# Altium PCB 6APoLPSU.PcbDoc
Units mil, origin at the board's own origin, x right, y up, seen from the top; angles counter-clockwise.
Board outline 1580 x 955 mil, 2 copper layers (Top Layer, Bottom Layer); 27 components, 16 nets, 83 pads, 58 vias.
Unrouted connection lines stored in the file: 1.
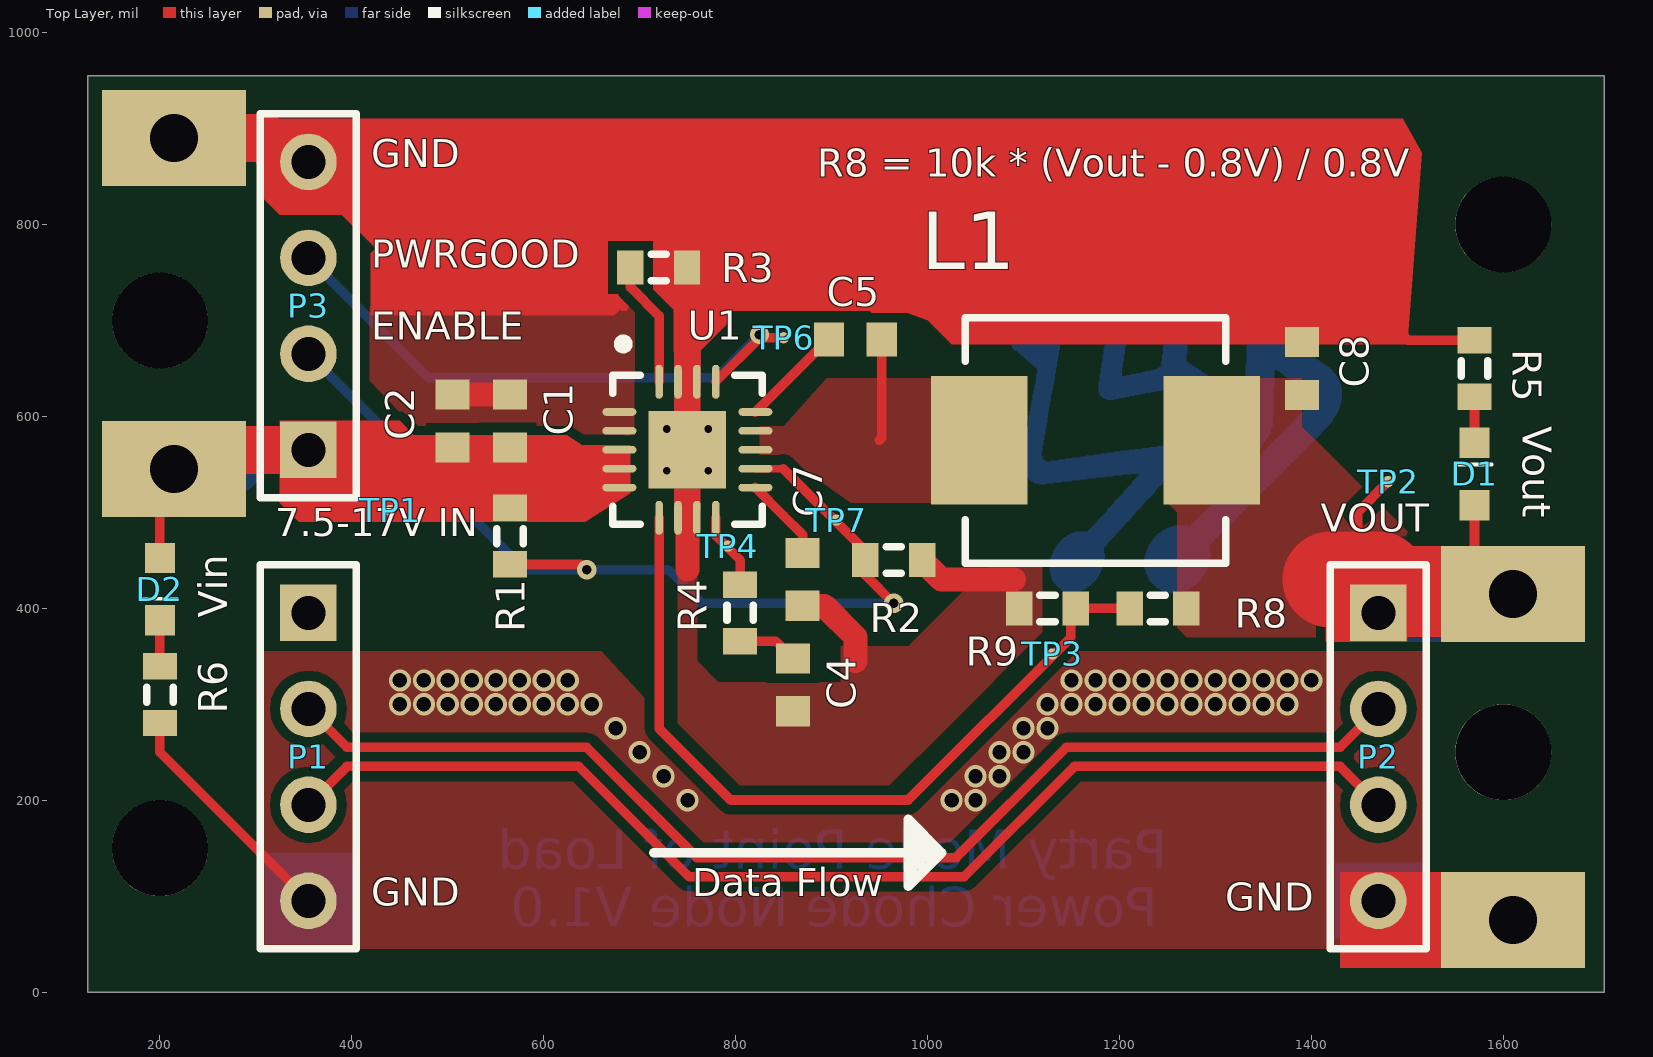
[diagram p0: Top Layer view]
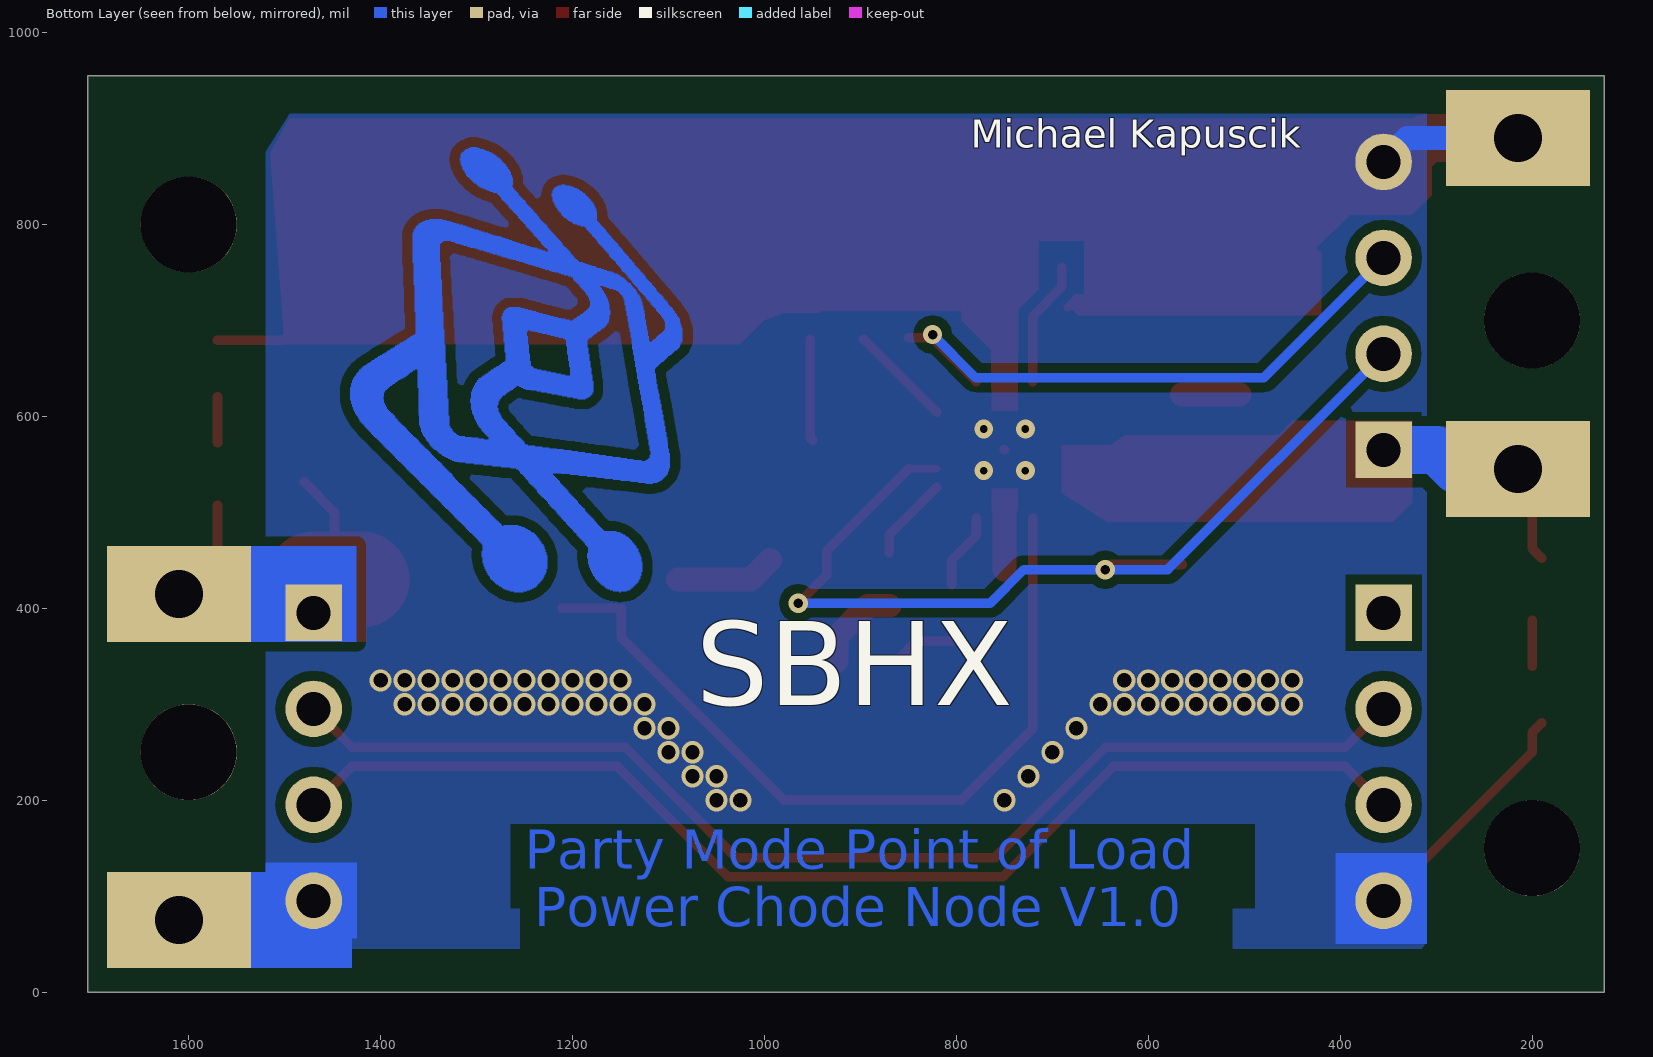
[diagram p1: Bottom Layer view, seen from below]

## Layer stack, top to bottom
Top Solder: solder mask 0.4, Solder Resist, Dk 3.5
Top Layer: signal copper 1.4
Dielectric 1: dielectric 12.6, FR-4, Dk 4.8
Bottom Layer: signal copper 1.4
Bottom Solder: solder mask 0.4, Solder Resist, Dk 3.5

## Board outline
125,0 125,955 1705,955 1705,0

## Design rules (kind name [scope] priority, off if disabled: settings)
Clearance [All] p1: gap=10 ignorepadtopadclearanceinfootprint=FALSE except(0: Arc-Hole Track-Hole SMDPad-Hole THPad-Hole Via-Hole Fill-Hole Poly-Hole Region-Hole Text-Hole)
PolygonConnect [InComponent('U1')] p1: connectstyle=Direct reliefconductorwidth=10 reliefentries=4 polygonreliefangle="90 Angle" airgapwidth=10
PolygonConnect PolygonConnect_1 [All] p2: connectstyle=Direct reliefconductorwidth=10 reliefentries=4 polygonreliefangle="90 Angle" airgapwidth=10
RoutingVias [All] p1: holewidth=28 width=50 viastyle="Through Hole" minholewidth=28 minwidth=50 maxholewidth=28 maxwidth=50
SolderMaskExpansion [All] p1: expansion=4 istentingtop=FALSE
Width [All] p1: maxlimit=100 minlimit=10 preferedwidth=10 minimp=50.000000 maximp=50.000000 favimp=50.000000
30 further rules are at their usual default settings.

## Classes and differential pairs
component class U_TPS54620: C1 C2 C4 C5 C7 C8 D1 D2 L1 R1 R2 R3 R4 R5 R6 R8 R9 TP1 TP2 TP3 TP4 TP6 TP7 U1
component class Top: P1 P2 P3

## Components (designator, comment, footprint, x,y, rotation, side; value= is the part's Value field where it differs from the comment)
C1 "Cap" 1608[0603] 564.76,595.24 r90 top
C2 "Cap" 1608[0603] 504.76,595.24 r90 top
C4 "Cap" 1608[0603] 859.76,320.24 r90 top
C5 "Cap" 1608[0603] 924.76,680.24 r0 top
C7 "Cap" 1608[0603] 869.76,430.24 r90 top
C8 "Cap" 1608[0603] 1390,650 r270 top
D1 "LED0" "0603 LED" 1570,540 r90 top
D2 "LED0" "0603 LED" 200,420 r270 top
L1 "IHLP2525CZER3R3M01" INDP6965X30M 1175,575 r0 top
P1 "WS2801 Connector" HDR1X4 354.76,395.24 r270 top
P2 "WS2801 Connector" HDR1X4 1469.76,395.24 r270 top
P3 "Header 4" HDR1X4 354.76,565.24 r90 top
R1 "Res3" J1-0603 564.76,475.24 r90 top
R2 "Res3" J1-0603 964.76,450.24 r180 top
R3 "Res3" J1-0603 719.76,755.24 r0 top
R4 "Res3" J1-0603 804.76,395.24 r90 top
R5 "Res3" J1-0603 1570,650 r270 top
R6 "Res3" J1-0603 200,310 r90 top
R8 "Res3" J1-0603 1240,400 r0 top
R9 "Res3" J1-0603 1125,400 r0 top
TP1 "Test Point" TESTPOINT_0.3mm 440,500 r90 top
TP2 "Test Point" TESTPOINT_0.3mm 1480,530 r90 top
TP3 "Test Point" TESTPOINT_0.3mm 1130,350.47 r90 top
TP4 "Test Point" TESTPOINT_0.3mm 792.03,462.97 r90 top
TP6 "Test Point" TESTPOINT_0.3mm 850,680 r90 top
TP7 "Test Point" TESTPOINT_0.3mm 905,490 r90 top
U1 "Buck Regulator" S-PVQFN-N14 749.76,565.24 r270 top

## Footprints (in the part's own frame and the unit in brackets; to place one, negate y for a bottom-side part, rotate by r counter-clockwise, add the part's x,y. Pads: shape width x height; smd on the part's side, far side on the other; paste and mask are expansions set on the pad)
"0603 LED" [mm]
  rect 0.8x0.8 smd: 1(-0.825,0) 2(0.825,0)
  silkscreen extent 0.25,-0.46 0.25,0.46
1608[0603] [mm] "Chip Capacitor, Body 1.6x0.8mm, IPC High Density"
  rect 0.8x0.9 smd: 1(-0.7,0) 2(0.7,0)
  body extent -0.87,-0.48 0.87,0.48, height 1.3
HDR1X4 [mm] "Connector; Header; 4 Position"
  rect 1.5x1.5 hole 0.9: 1(0,0)
  round 1.5 hole 0.9: 2(2.54,0) 3(5.08,0) 4(7.62,0)
  silkscreen extent -1.27,-1.27 8.89,1.27
INDP6965X30M [mm] "Precision Wire Wound Inductor, 2-Leads, Body 6.86x6.47mm, IPC Low Density"
  rect 2.55x3.4 smd: 1(-3.075,0) 2(3.075,0)
  silkscreen extent -3.45,-3.25 3.45,3.25, body extent -3.43,-3.23 3.43,3.23, height 3
J1-0603 [mm] "Chip Resistor, Body 1.6x0.8mm, IPC High Density"
  rect 0.7x0.9 smd: 1(-0.75,0) 2(0.75,0)
  silkscreen extent -0.2,-0.35 0.2,0.35, body extent -0.85,-0.48 0.85,0.48, height 0.9
S-PVQFN-N14 [mm] "TI-TPS54620 Boost Converter"
  oval 0.9x0.2 smd: 1(-1.8,-0.75) 7(1.8,-0.75) 8(1.8,0.75) 14(-1.8,0.75) PAD(-1.8,-0.25) PAD(-1.8,0.25) PAD(1.8,-0.25) PAD(1.8,0.25)
  oval 0.2x0.9 smd: 2(-1,-1.8) 3(-0.5,-1.8) 4(0,-1.8) 5(0.5,-1.8) 6(1,-1.8) 9(1,1.8) 10(0.5,1.8) 11(0,1.8) 12(-0.5,1.8) 13(-1,1.8)
  rect 2.05x2.05 smd: PAD(0,0)
  Top Layer region: -1.625,-0.35 -1.025,-0.35 -1.025,0.35 -1.625,0.35
  Top Layer region: 1.625,0.35 1.025,0.35 1.025,-0.35 1.625,-0.35
  silkscreen extent -2.92,-1.97 1.97,1.97, body extent -1.83,-1.83 1.83,1.83, height 1
TESTPOINT_0.3mm [mm]
  round 0.3 smd paste-1: TP(0.05,0)

## Part data
C1 C2 C4 C5 C7 C8: library part "Cap Semi", "Capacitor (Semiconductor SIM Model)"
D1 D2: "Typical INFRARED GaAs LED"
L1: "3.3uH Shielded Inductor"
P1 P2 P3: "Header, 4-Pin"
R1 R2 R3 R4 R5 R6 R8 R9: "Resistor"
U1: library part TPS54620RGYT, "IC REG BUCK ADJ 6A SYNC 14VQFN"

## Free pads (board coordinates)
  round 100 hole 100: 0(200,150) 0(200,700) 1(1600,250) 1(1600,800)
  rect 150x100 hole 50 unplated: 0(214.76,545.24) 1(214.76,890.24) 1(1610,75) 1(1610,415)
  rect 150x100 smd far side: 0(214.76,545.24) 1(214.76,890.24) 1(1610,75) 1(1610,415)

## Via types
v1: diameter 23, hole 15, Top Layer to Bottom Layer, 51 vias
v2: diameter 19.68, hole 7.87, Top Layer to Bottom Layer, 4 vias
v3: diameter 20, hole 10, Top Layer to Bottom Layer, 3 vias

## Nets (pads, with @x,y where several pads share a name; then routed paths per layer and width w, separated by ;. In a path a pad name is that pad's centre, name@x,y a point inside that pad or via, vN(x,y) a via of type N, cw(c..) or ccw(c..) an arc to the next point about the centre after c; other vN are vias at no path point)
EN: P3.2 R1.1 R2.2 TP7.TP U1.10 | length 1016.9
  Top Layer w8: U1.10 849.45,545.55
  Top Layer w10: R1.1 639.29,445.71 v3(644.76,440.24) ; 849.45,545.55 935.24,459.76 R2.2 935.24,434.76 v3(964.76,405.24)
  Bottom Layer w10: P3.2 579.76,440.24 v3(644.76,440.24) 729.76,440.24 764.76,405.24 v3(964.76,405.24)
GND: C1.2 C2.2 C4.1 C7.1 C8.1 P1.4 P2.4 P3.4 pad.1@214.76,890.24 pad.1@1610,75 R2.1 R3.2 R5.1 R6.1 R9.1 U1.2 U1.3 U1.PAD | length 966.9
  Top Layer w10: R6.1@190,280.47 200,270.47 200,250 P1.4 ; U1.PAD@749.76,565.24 U1.PAD@750,565.47 ; 1490,690 1500.47,679.53 R5.1
  Top Layer w25: 329.76,890.24 P3.4 ; C2.2 C1.2 ; 749.76,440.24 749.76,500.24 ; C7.1 892.32,402.68 924.76,370.24 924.76,345.24 ; R2.1 1014.29,430.24 1090.24,430.24
  Top Layer w50: pad.1@214.76,890.24 309.76,890.24 334.76,865.24 P3.4
  Bottom Layer w25: pad.1@239.76,890.24 329.76,890.24 P3.4
  other v1: 750,200 1025,200 1050,200 725,225 1050,225 1075,225 700,250 1075,250 1100,250 675,275 1100,275 1125,275 450,300 475,300 500,300 525,300 550,300 575,300 600,300 625,300 650,300 1125,300 1150,300 1175,300 1200,300 1225,300 1250,300 1275,300 1300,300 1325,300 1350,300 1375,300 450,325 475,325 500,325 525,325 550,325 575,325 600,325 625,325 1150,325 1175,325 1200,325 1225,325 1250,325 1275,325 1300,325 1325,325 1350,325 1375,325 1400,325
  other v2: 728.11,543.58 771.42,543.58 728.11,586.89 771.42,586.89
NetC4_2: C4.2 R4.1 | length 62.4
  Top Layer w10: R4.1 841.85,365.71 C4.2
NetC5_1: C5.1 U1.13 | length 107.9
  Top Layer w10: U1.13 896.26,680.24 C5.1
NetC5_2: C5.2 L1.1 U1.11 U1.12 | length 106
  Top Layer w10: 949.96,575.24 952.32,577.6 C5.2
NetC7_2: C7.2 U1.9 | length 88.4
  Top Layer w10: U1.9 850,496.5 869.76,476.73 C7.2
NetD1_2: D1.2 R5.2 | length 48
  Top Layer w10: D1.2 R5.2
NetD2_2: D2.2 R6.2 | length 48
  Top Layer w10: R6.2 D2.2
NetP1_2: P1.2 P2.2 | length 1243.4
  Top Layer w10: P1.2 394.76,255.24 644.76,255.24 759.76,140.24 1029.76,140.24 1144.76,255.24 1429.76,255.24 P2.2
NetP1_3: P1.3 P2.3 | length 1243.4
  Top Layer w10: P1.3 394.76,235.24 636.48,235.24 751.48,120.24 1038.05,120.24 1153.05,235.24 1429.76,235.24 P2.3
NetP3_3: P3.3 TP6.TP U1.14 | length 630.1
  Top Layer w10: U1.14 825.16,681.97 TP6.TP
  Bottom Layer w10: P3.3 479.76,640.24 779.76,640.24 v3(824.76,685.24)
NetR3_1: R3.1 U1.1 | length 131.6
  Top Layer w10: R3.1 690.24,734.76 720.24,704.76 U1.1
NetR4_2: R4.2 TP4.TP U1.8 | length 80.2
  Top Layer w10: U1.8 779.29,475.71 804.76,450.24 R4.2
NetR8_1: R8.1 R9.2 TP3.TP U1.7 | length 835.9
  Top Layer w10: U1.7 720.24,274.76 794.76,200.24 979.76,200.24 1149.29,369.76 R9.2@1149.29,400 ; R9.2 R8.1
VIN: C1.1 C2.1 D2.1 P3.1 pad.0@214.76,545.24 R1.2 TP1.TP U1.4 U1.5 U1.6 | length 359.9
  Top Layer w10: D2.1@190,452.48 200,462.48 200,505.47 pad.0@239.76,545.24
  Top Layer w50: pad.0@239.76,545.24 259.76,565.24 P3.1
  Bottom Layer w50: pad.0@239.76,545.24 279.76,545.24 299.76,565.24 P3.1
VOUT: C8.2 D1.1 L1.2 P2.1 pad.1@1610,415 R8.2 TP2.TP | length 285.9
  Top Layer w10: 1420,430 1448.03,458.03 1448.03,500 TP2.TP ; D1.1 1570,455 pad.1@1610,415
  Top Layer w100: 1420,430 1470,430
pads on no net: P1.1
copper on no net: | length 53410
  Bottom Layer w1: 1085.5,678 1117.5,678 ; 1085.5,679 1116.5,679 ; 1085.5,680 1115.5,680 ; 1085.5,681 1113.5,681 ; 1085.5,682 1112.5,682 ; 1085.5,683 1111.5,683 ; 1085.5,684 1110.5,684 ; 1085.5,685 1109.5,685 ; 1085.5,686 1107.5,686 ; 1085.5,687 1106.5,687 ; 1085.5,688 1105.5,688 ; 1085.5,689 1104.5,689 ; 1085.5,690 1104.5,690 ; 1085.5,691 1103.5,691 ; 1085.5,692 1103.5,692 ; 1086.5,676 1138.5,676 ; 1086.5,677 1138.5,677 ; 1086.5,693 1103.5,693 ; 1086.5,694 1103.5,694 ; 1086.5,695 1103.5,695 ; 1087.5,674 1137.5,674 ; 1087.5,675 1137.5,675 ; 1087.5,696 1103.5,696 ; 1087.5,697 1103.5,697 ; 1087.5,698 1103.5,698 ; 1088.5,672 1137.5,672 ; 1088.5,673 1137.5,673 ; 1088.5,699 1104.5,699 ; 1088.5,700 1104.5,700 ; 1088.5,701 1105.5,701 ; 1089.5,671 1137.5,671 ; 1089.5,702 1105.5,702 ; 1089.5,703 1106.5,703 ; 1090.5,670 1137.5,670 ; 1090.5,704 1107.5,704 ; 1091.5,669 1136.5,669 ; 1091.5,705 1107.5,705 ; 1091.5,706 1108.5,706 ; 1092.5,707 1109.5,707 ; 1093.5,668 1136.5,668 ; 1093.5,708 1110.5,708 ; 1093.5,709 1111.5,709 ; 1094.5,667 1136.5,667 ; 1094.5,710 1112.5,710 ; 1095.5,666 1136.5,666 ; 1095.5,711 1112.5,711 ; 1095.5,712 1113.5,712 ; 1096.5,665 1136.5,665 ; 1096.5,713 1114.5,713 ; 1097.5,664 1136.5,664 ; 1097.5,714 1115.5,714 ; 1098.5,546 1264.5,546 ; 1098.5,547 1274.5,547 ; 1098.5,548 1283.5,548 ; 1098.5,549 1292.5,549 ; 1098.5,550 1302.5,550 ; 1098.5,551 1311.5,551 ; 1098.5,552 1318.5,552 ; 1098.5,553 1322.5,553 ; 1098.5,554 1123.5,554 ; 1098.5,555 1121.5,555 ; 1098.5,556 1120.5,556 ; 1098.5,557 1119.5,557 ; 1098.5,558 1119.5,558 ; 1098.5,559 1119.5,559 ; 1098.5,560 1118.5,560 ; 1098.5,561 1118.5,561 ; 1098.5,663 1135.5,663 ; 1098.5,715 1116.5,715 ; 1099.5,543 1255.5,543 ; 1099.5,544 1256.5,544 ; 1099.5,545 1258.5,545 ; 1099.5,562 1118.5,562 ; 1099.5,563 1118.5,563 ; 1099.5,564 1119.5,564 ; 1099.5,565 1119.5,565 ; 1099.5,566 1119.5,566 ; 1099.5,716 1117.5,716 ; 1100.5,541 1254.5,541 ; 1100.5,542 1254.5,542 ; 1100.5,567 1119.5,567 ; 1100.5,568 1119.5,568 ; 1100.5,569 1119.5,569 ; 1100.5,570 1120.5,570 ; 1100.5,571 1120.5,571 ; 1100.5,572 1120.5,572 ; 1100.5,662 1135.5,662 ; 1100.5,717 1118.5,717 ; 1100.5,718 1118.5,718 ; 1101.5,539 1202.5,539 ; 1101.5,540 1211.5,540 ; 1101.5,573 1120.5,573 ; 1101.5,574 1120.5,574 ; 1101.5,575 1120.5,575 ; 1101.5,576 1121.5,576 ; 1101.5,577 1121.5,577 ; 1101.5,578 1121.5,578 ; 1101.5,661 1135.5,661 ; 1101.5,719 1119.5,719 ; 1102.5,538 1193.5,538 ; 1102.5,579 1121.5,579 ; 1102.5,580 1121.5,580 ; 1102.5,581 1121.5,581 ; 1102.5,582 1122.5,582 ; 1102.5,583 1122.5,583 ; 1102.5,660 1135.5,660 ; 1102.5,720 1120.5,720 ; 1103.5,537 1184.5,537 ; 1103.5,584 1122.5,584 ; 1103.5,585 1122.5,585 ; 1103.5,586 1122.5,586 ; 1103.5,587 1122.5,587 ; 1103.5,588 1123.5,588 ; 1103.5,589 1123.5,589 ; 1103.5,659 1135.5,659 ; 1103.5,721 1121.5,721 ; 1104.5,536 1174.5,536 ; 1104.5,590 1123.5,590 ; 1104.5,591 1123.5,591 ; 1104.5,592 1123.5,592 ; 1104.5,593 1123.5,593 ; 1104.5,594 1124.5,594 ; 1104.5,595 1124.5,595 ; 1104.5,658 1135.5,658 ; 1104.5,722 1122.5,722 ; 1105.5,535 1166.5,535 ; 1105.5,596 1124.5,596 ; 1105.5,597 1124.5,597 ; 1105.5,598 1124.5,598 ; 1105.5,599 1124.5,599 ; 1105.5,600 1125.5,600 ; 1105.5,601 1125.5,601 ; 1105.5,657 1134.5,657 ; 1105.5,723 1123.5,723 ; 1105.5,724 1123.5,724 ; 1106.5,534 1157.5,534 ; 1106.5,602 1125.5,602 ; 1106.5,603 1125.5,603 ; 1106.5,604 1125.5,604 ; 1106.5,605 1125.5,605 ; 1106.5,606 1126.5,606 ; 1106.5,725 1124.5,725 ; 1107.5,533 1149.5,533 ; 1107.5,607 1126.5,607 ; 1107.5,608 1126.5,608 ; 1107.5,609 1126.5,609 ; 1107.5,610 1126.5,610 ; 1107.5,611 1126.5,611 ; 1107.5,612 1127.5,612 ; 1107.5,656 1134.5,656 ; 1107.5,726 1125.5,726 ; 1108.5,613 1127.5,613 ; 1108.5,614 1127.5,614 ; 1108.5,615 1127.5,615 ; 1108.5,616 1127.5,616 ; 1108.5,617 1128.5,617 ; 1108.5,655 1134.5,655 ; 1108.5,727 1126.5,727 ; 1109.5,532 1139.5,532 ; 1109.5,618 1128.5,618 ; 1109.5,619 1128.5,619 ; 1109.5,620 1128.5,620 ; 1109.5,621 1128.5,621 ; 1109.5,622 1128.5,622 ; 1109.5,623 1129.5,623 ; 1109.5,654 1134.5,654 ; 1109.5,728 1127.5,728 ; 1110.5,624 1129.5,624 ; 1110.5,625 1129.5,625 ; 1110.5,626 1129.5,626 ; 1110.5,627 1129.5,627 ; 1110.5,653 1134.5,653 ; 1110.5,729 1128.5,729 ; 1111.5,531 1131.5,531 ; 1111.5,628 1130.5,628 ; 1111.5,629 1130.5,629 ; 1111.5,630 1130.5,630 ; 1111.5,631 1130.5,631 ; 1111.5,632 1130.5,632 ; 1111.5,633 1130.5,633 ; 1111.5,652 1134.5,652 ; 1111.5,730 1129.5,730 ; 1112.5,634 1131.5,634 ; 1112.5,635 1131.5,635 ; 1112.5,636 1131.5,636 ; 1112.5,637 1131.5,637 ; 1112.5,638 1131.5,638 ; 1112.5,651 1133.5,651 ; 1112.5,731 1130.5,731 ; 1112.5,732 1131.5,732 ; 1113.5,639 1132.5,639 ; 1113.5,640 1132.5,640 ; 1113.5,641 1132.5,641 ; 1113.5,642 1132.5,642 ; 1113.5,643 1132.5,643 ; 1113.5,644 1132.5,644 ; 1113.5,650 1133.5,650 ; 1113.5,733 1131.5,733 ; 1114.5,645 1132.5,645 ; 1114.5,646 1133.5,646 ; 1114.5,647 1133.5,647 ; 1114.5,648 1133.5,648 ; 1114.5,649 1133.5,649 ; 1114.5,734 1132.5,734 ; 1115.5,735 1133.5,735 ; 1116.5,530 1123.5,530 ; 1116.5,736 1134.5,736 ; 1117.5,737 1135.5,737 ; 1117.5,738 1136.5,738 ; 1118.5,739 1136.5,739 ; 1119.5,678 1138.5,678 ; 1119.5,740 1137.5,740 ; 1120.5,679 1138.5,679 ; 1120.5,680 1138.5,680 ; 1120.5,681 1138.5,681 ; 1120.5,682 1139.5,682 ; 1120.5,683 1139.5,683 ; 1120.5,741 1138.5,741 ; 1121.5,684 1139.5,684 ; 1121.5,685 1139.5,685 ; 1121.5,686 1139.5,686 ; 1121.5,687 1139.5,687 ; 1121.5,688 1140.5,688 ; 1121.5,689 1140.5,689 ; 1121.5,742 1139.5,742 ; 1122.5,690 1140.5,690 ; 1122.5,691 1140.5,691 ; 1122.5,692 1140.5,692 ; 1122.5,693 1141.5,693 ; 1122.5,694 1141.5,694 ; 1122.5,743 1140.5,743 ; 1123.5,695 1141.5,695 ; 1123.5,696 1141.5,696 ; 1123.5,697 1141.5,697 ; 1123.5,698 1141.5,698 ; 1123.5,699 1142.5,699 ; 1123.5,700 1142.5,700 ; 1123.5,744 1141.5,744 ; 1123.5,745 1142.5,745 ; 1124.5,701 1142.5,701 ; 1124.5,702 1142.5,702 ; 1124.5,703 1142.5,703 ; 1124.5,704 1142.5,704 ; 1124.5,705 1143.5,705 ; 1124.5,706 1143.5,706 ; 1124.5,746 1142.5,746 ; 1125.5,707 1143.5,707 ; 1125.5,708 1143.5,708 ; 1125.5,709 1143.5,709 ; 1125.5,710 1144.5,710 ; 1125.5,747 1143.5,747 ; 1126.5,711 1144.5,711 ; 1126.5,712 1144.5,712 ; 1126.5,713 1144.5,713 ; 1126.5,714 1144.5,714 ; 1126.5,715 1144.5,715 ; 1126.5,748 1144.5,748 ; 1127.5,438 1180.5,438 ; 1127.5,439 1180.5,439 ; 1127.5,440 1181.5,440 ; 1127.5,441 1181.5,441 ; 1127.5,442 1181.5,442 ; 1127.5,443 1182.5,443 ; 1127.5,444 1182.5,444 ; 1127.5,445 1182.5,445 ; 1127.5,446 1183.5,446 ; 1127.5,447 1183.5,447 ; 1127.5,448 1183.5,448 ; 1127.5,716 1145.5,716 ; 1127.5,717 1145.5,717 ; 1127.5,718 1145.5,718 ; 1127.5,719 1145.5,719 ; 1127.5,749 1145.5,749 ; 1128.5,434 1178.5,434 ; 1128.5,435 1178.5,435 ; 1128.5,436 1179.5,436 ; 1128.5,437 1179.5,437 ; 1128.5,449 1183.5,449 ; 1128.5,450 1183.5,450 ; 1128.5,451 1183.5,451 ; 1128.5,452 1184.5,452 ; 1128.5,453 1184.5,453 ; 1128.5,554 1325.5,554 ; 1128.5,720 1145.5,720 ; 1128.5,721 1146.5,721 ; 1128.5,722 1146.5,722 ; 1128.5,750 1146.5,750 ; 1129.5,431 1176.5,431 ; 1129.5,432 1176.5,432 ; 1129.5,433 1177.5,433 ; 1129.5,454 1184.5,454 ; 1129.5,455 1184.5,455 ; 1129.5,456 1184.5,456 ; 1129.5,723 1146.5,723 ; 1129.5,724 1147.5,724 ; 1129.5,751 1147.5,751 ; 1129.5,752 1148.5,752 ; 1130.5,429 1174.5,429 ; 1130.5,430 1175.5,430 ; 1130.5,457 1184.5,457 ; 1130.5,458 1183.5,458 ; 1130.5,725 1147.5,725 ; 1130.5,726 1148.5,726 ; 1130.5,753 1148.5,753 ; 1131.5,427 1172.5,427 ; 1131.5,428 1173.5,428 ; 1131.5,459 1183.5,459 ; 1131.5,460 1183.5,460 ; 1131.5,461 1183.5,461 ; 1131.5,727 1149.5,727 ; 1131.5,754 1149.5,754 ; 1132.5,426 1171.5,426 ; 1132.5,462 1183.5,462 ; 1132.5,728 1150.5,728 ; 1132.5,729 1151.5,729 ; 1132.5,755 1150.5,755 ; 1133.5,425 1170.5,425 ; 1133.5,463 1183.5,463 ; 1133.5,464 1184.5,464 ; 1133.5,730 1152.5,730 ; 1133.5,731 1154.5,731 ; 1133.5,756 1151.5,756 ; 1134.5,424 1169.5,424 ; 1134.5,465 1185.5,465 ; 1134.5,732 1157.5,732 ; 1134.5,757 1152.5,757 ; 1135.5,423 1167.5,423 ; 1135.5,466 1186.5,466 ; 1135.5,467 1186.5,467 ; 1135.5,733 1161.5,733 ; 1135.5,758 1153.5,758 ; 1135.5,759 1154.5,759 ; 1136.5,422 1166.5,422 ; 1136.5,468 1187.5,468 ; 1136.5,555 1327.5,555 ; 1136.5,734 1164.5,734 ; 1136.5,760 1154.5,760 ; 1137.5,421 1165.5,421 ; 1137.5,469 1188.5,469 ; 1137.5,735 1167.5,735 ; 1137.5,761 1155.5,761 ; 1138.5,470 1189.5,470 ; 1138.5,736 1192.5,736 ; 1138.5,762 1156.5,762 ; 1139.5,420 1163.5,420 ; 1139.5,471 1190.5,471 ; 1139.5,737 1193.5,737 ; 1139.5,738 1194.5,738 ; 1139.5,763 1157.5,763 ; 1140.5,419 1160.5,419 ; 1140.5,472 1191.5,472 ; 1140.5,764 1158.5,764 ; 1141.5,473 1192.5,473 ; 1141.5,739 1195.5,739 ; 1141.5,765 1159.5,765 ; 1141.5,766 1160.5,766 ; 1142.5,474 1193.5,474 ; 1142.5,740 1196.5,740 ; 1142.5,767 1161.5,767 ; 1143.5,418 1157.5,418 ; 1143.5,556 1329.5,556 ; 1143.5,741 1197.5,741 ; 1143.5,768 1161.5,768 ; 1144.5,475 1194.5,475 ; 1144.5,742 1198.5,742 ; 1144.5,769 1162.5,769 ; 1145.5,476 1195.5,476 ; 1145.5,743 1199.5,743 ; 1145.5,770 1163.5,770 ; 1146.5,744 1199.5,744 ; 1146.5,771 1164.5,771 ; 1147.5,477 1195.5,477 ; 1147.5,772 1165.5,772 ; 1147.5,773 1166.5,773 ; 1148.5,745 1201.5,745 ; 1148.5,774 1167.5,774 ; 1149.5,417 1151.5,417 ; 1149.5,478 1196.5,478 ; 1149.5,775 1167.5,775 ; 1150.5,557 1331.5,557 ; 1150.5,746 1204.5,746 ; 1150.5,776 1168.5,776 ; 1151.5,479 1197.5,479 ; 1151.5,747 1208.5,747 ; 1151.5,777 1169.5,777 ; 1152.5,778 1170.5,778 ; 1152.5,779 1171.5,779 ; 1153.5,748 1211.5,748 ; 1153.5,780 1172.5,780 ; 1154.5,480 1198.5,480 ; 1154.5,781 1173.5,781 ; 1155.5,782 1173.5,782 ; 1156.5,749 1214.5,749 ; 1156.5,783 1174.5,783 ; 1157.5,784 1175.5,784 ; 1158.5,558 1333.5,558 ; 1158.5,750 1218.5,750 ; 1158.5,785 1176.5,785 ; 1159.5,786 1177.5,786 ; 1159.5,787 1178.5,787 ; 1160.5,706 1191.5,706 ; 1160.5,707 1189.5,707 ; 1160.5,708 1188.5,708 ; 1160.5,709 1187.5,709 ; 1160.5,710 1185.5,710 ; 1160.5,788 1179.5,788 ; 1161.5,701 1198.5,701 ; 1161.5,702 1196.5,702 ; 1161.5,703 1195.5,703 ; 1161.5,704 1194.5,704 ; 1161.5,705 1192.5,705 ; 1161.5,711 1184.5,711 ; 1161.5,712 1183.5,712 ; 1161.5,713 1182.5,713 ; 1161.5,714 1182.5,714 ; 1161.5,715 1181.5,715 ; 1161.5,716 1181.5,716 ; 1161.5,751 1221.5,751 ; 1161.5,789 1179.5,789 ; 1162.5,698 1272.5,698 ; 1162.5,699 1272.5,699 ; 1162.5,700 1199.5,700 ; 1162.5,717 1181.5,717 ; 1162.5,718 1181.5,718 ; 1162.5,719 1181.5,719 ; 1162.5,790 1180.5,790 ; 1163.5,697 1272.5,697 ; 1163.5,720 1181.5,720 ; 1163.5,721 1182.5,721 ; 1163.5,722 1182.5,722 ; 1163.5,791 1181.5,791 ; 1164.5,695 1272.5,695 ; 1164.5,696 1272.5,696 ; 1164.5,723 1182.5,723 ; 1164.5,724 1183.5,724 ; 1164.5,752 1224.5,752 ; 1164.5,792 1182.5,792 ; 1165.5,559 1335.5,559 ; 1165.5,694 1272.5,694 ; 1165.5,725 1183.5,725 ; 1165.5,726 1184.5,726 ; 1165.5,793 1183.5,793 ; 1165.5,794 1184.5,794 ; 1166.5,693 1272.5,693 ; 1166.5,727 1185.5,727 ; 1166.5,728 1185.5,728 ; 1166.5,795 1185.5,795 ; 1167.5,481 1199.5,481 ; 1167.5,692 1272.5,692 ; 1167.5,729 1186.5,729 ; 1167.5,730 1187.5,730 ; 1167.5,753 1228.5,753 ; 1167.5,796 1185.5,796 ; 1168.5,482 1200.5,482 ; 1168.5,731 1188.5,731 ; 1168.5,797 1187.5,797 ; 1169.5,483 1201.5,483 ; 1169.5,691 1272.5,691 ; 1169.5,732 1189.5,732 ; 1169.5,733 1190.5,733 ; 1169.5,798 1191.5,798 ; 1170.5,484 1202.5,484 ; 1170.5,690 1272.5,690 ; 1170.5,734 1191.5,734 ; 1170.5,754 1231.5,754 ; 1170.5,799 1194.5,799 ; 1171.5,485 1203.5,485 ; 1171.5,689 1243.5,689 ; 1171.5,735 1192.5,735 ; 1171.5,800 1197.5,800 ; 1171.5,801 1199.5,801 ; 1172.5,486 1204.5,486 ; 1172.5,560 1336.5,560 ; 1172.5,802 1200.5,802 ; 1173.5,487 1205.5,487 ; 1173.5,688 1239.5,688 ; 1173.5,803 1202.5,803 ; 1174.5,488 1206.5,488 ; 1174.5,687 1235.5,687 ; 1174.5,755 1234.5,755 ; 1174.5,804 1204.5,804 ; 1174.5,805 1205.5,805 ; 1174.5,806 1206.5,806 ; 1174.5,807 1208.5,807 ; 1174.5,808 1209.5,808 ; 1174.5,809 1210.5,809 ; 1174.5,810 1211.5,810 ; 1174.5,811 1211.5,811 ; 1174.5,812 1212.5,812 ; 1174.5,813 1213.5,813 ; 1175.5,489 1206.5,489 ; 1175.5,686 1231.5,686 ; 1175.5,814 1214.5,814 ; 1175.5,815 1215.5,815 ; 1175.5,816 1215.5,816 ; 1176.5,490 1207.5,490 ; 1176.5,756 1238.5,756 ; 1176.5,817 1216.5,817 ; 1176.5,818 1217.5,818 ; 1177.5,491 1208.5,491 ; 1177.5,492 1209.5,492 ; 1177.5,685 1226.5,685 ; 1177.5,819 1217.5,819 ; 1177.5,820 1218.5,820 ; 1178.5,493 1210.5,493 ; 1178.5,625 1232.5,625 ; 1178.5,626 1237.5,626 ; 1178.5,627 1243.5,627 ; 1178.5,628 1248.5,628 ; 1178.5,629 1251.5,629 ; 1178.5,630 1253.5,630 ; 1178.5,631 1255.5,631 ; 1178.5,632 1302.5,632 ; 1178.5,633 1301.5,633 ; 1178.5,634 1301.5,634 ; 1178.5,635 1300.5,635 ; 1178.5,636 1299.5,636 ; 1178.5,684 1222.5,684 ; 1178.5,821 1218.5,821 ; 1178.5,822 1219.5,822 ; 1179.5,494 1211.5,494 ; 1179.5,623 1221.5,623 ; 1179.5,624 1226.5,624 ; 1179.5,637 1299.5,637 ; 1179.5,638 1297.5,638 ; 1179.5,639 1297.5,639 ; 1179.5,640 1295.5,640 ; 1179.5,641 1294.5,641 ; 1179.5,642 1293.5,642 ; 1179.5,643 1202.5,643 ; 1179.5,683 1218.5,683 ; 1179.5,823 1219.5,823 ; 1180.5,495 1212.5,495 ; 1180.5,561 1338.5,561 ; 1180.5,622 1215.5,622 ; 1180.5,644 1202.5,644 ; 1180.5,645 1202.5,645 ; 1180.5,646 1202.5,646 ; 1180.5,647 1202.5,647 ; 1180.5,648 1202.5,648 ; 1180.5,649 1202.5,649 ; 1180.5,650 1202.5,650 ; 1180.5,682 1214.5,682 ; 1180.5,757 1241.5,757 ; 1180.5,824 1220.5,824 ; 1181.5,496 1213.5,496 ; 1181.5,621 1210.5,621 ; 1181.5,651 1202.5,651 ; 1181.5,652 1203.5,652 ; 1181.5,653 1203.5,653 ; 1181.5,654 1203.5,654 ; 1181.5,655 1203.5,655 ; 1181.5,656 1203.5,656 ; 1181.5,657 1203.5,657 ; 1181.5,825 1220.5,825 ; 1181.5,826 1220.5,826 ; 1182.5,497 1214.5,497 ; 1182.5,620 1205.5,620 ; 1182.5,658 1204.5,658 ; 1182.5,659 1204.5,659 ; 1182.5,660 1204.5,660 ; 1182.5,661 1204.5,661 ; 1182.5,662 1204.5,662 ; 1182.5,663 1204.5,663 ; 1182.5,664 1204.5,664 ; 1182.5,681 1209.5,681 ; 1182.5,827 1220.5,827 ; 1183.5,498 1215.5,498 ; 1183.5,665 1205.5,665 ; 1183.5,666 1205.5,666 ; 1183.5,667 1205.5,667 ; 1183.5,668 1205.5,668 ; 1183.5,669 1205.5,669 ; 1183.5,670 1205.5,670 ; 1183.5,671 1205.5,671 ; 1183.5,680 1207.5,680 ; 1183.5,758 1245.5,758 ; 1183.5,828 1220.5,828 ; 1184.5,499 1216.5,499 ; 1184.5,619 1199.5,619 ; 1184.5,672 1205.5,672 ; 1184.5,673 1206.5,673 ; 1184.5,674 1206.5,674 ; 1184.5,675 1206.5,675 ; 1184.5,676 1206.5,676 ; 1184.5,677 1206.5,677 ; 1184.5,678 1206.5,678 ; 1184.5,679 1206.5,679 ; 1184.5,829 1221.5,829 ; 1185.5,500 1216.5,500 ; 1185.5,830 1221.5,830 ; 1186.5,501 1217.5,501 ; 1186.5,618 1194.5,618 ; 1186.5,759 1248.5,759 ; 1186.5,831 1221.5,831 ; 1187.5,502 1218.5,502 ; 1187.5,503 1219.5,503 ; 1187.5,562 1339.5,562 ; 1187.5,832 1221.5,832 ; 1188.5,504 1220.5,504 ; 1189.5,505 1221.5,505 ; 1189.5,760 1251.5,760 ; 1189.5,833 1220.5,833 ; 1190.5,506 1222.5,506 ; 1190.5,834 1220.5,834 ; 1191.5,507 1223.5,507 ; 1192.5,508 1223.5,508 ; 1192.5,835 1220.5,835 ; 1193.5,509 1225.5,509 ; 1193.5,761 1255.5,761 ; 1193.5,836 1219.5,836 ; 1194.5,510 1225.5,510 ; 1194.5,511 1226.5,511 ; 1194.5,563 1340.5,563 ; 1194.5,762 1258.5,762 ; 1195.5,512 1227.5,512 ; 1195.5,763 1262.5,763 ; 1195.5,837 1219.5,837 ; 1196.5,513 1228.5,513 ; 1196.5,764 1265.5,764 ; 1197.5,514 1229.5,514 ; 1197.5,765 1268.5,765 ; 1197.5,838 1218.5,838 ; 1198.5,515 1230.5,515 ; 1198.5,766 1272.5,766 ; 1199.5,516 1231.5,516 ; 1199.5,767 1275.5,767 ; 1199.5,839 1217.5,839 ; 1200.5,517 1232.5,517 ; 1200.5,768 1278.5,768 ; 1201.5,518 1233.5,518 ; 1201.5,564 1341.5,564 ; 1201.5,769 1282.5,769 ; 1202.5,519 1234.5,519 ; 1202.5,770 1285.5,770 ; 1202.5,771 1289.5,771 ; 1202.5,840 1215.5,840 ; 1203.5,520 1235.5,520 ; 1203.5,700 1273.5,700 ; 1203.5,772 1225.5,772 ; 1204.5,521 1236.5,521 ; 1204.5,522 1236.5,522 ; 1204.5,773 1225.5,773 ; 1205.5,523 1237.5,523 ; 1205.5,774 1226.5,774 ; 1206.5,524 1238.5,524 ; 1206.5,775 1227.5,775 ; 1207.5,525 1239.5,525 ; 1207.5,643 1291.5,643 ; 1207.5,701 1273.5,701 ; 1207.5,776 1228.5,776 ; 1207.5,841 1211.5,841 ; 1208.5,526 1240.5,526 ; 1208.5,777 1229.5,777 ; 1209.5,527 1241.5,527 ; 1209.5,565 1343.5,565 ; 1209.5,778 1230.5,778 ; 1210.5,528 1242.5,528 ; 1210.5,779 1231.5,779 ; 1210.5,780 1232.5,780 ; 1211.5,529 1243.5,529 ; 1211.5,702 1273.5,702 ; 1211.5,781 1232.5,781 ; 1212.5,530 1244.5,530 ; 1212.5,644 1290.5,644 ; 1212.5,782 1233.5,782 ; 1213.5,531 1245.5,531 ; 1213.5,532 1245.5,532 ; 1213.5,783 1234.5,783 ; 1214.5,533 1246.5,533 ; 1214.5,784 1235.5,784 ; 1215.5,534 1247.5,534 ; 1215.5,703 1273.5,703 ; 1215.5,785 1236.5,785 ; 1216.5,535 1248.5,535 ; 1216.5,566 1344.5,566 ; 1216.5,786 1237.5,786 ; 1217.5,536 1249.5,536 ; 1217.5,645 1288.5,645 ; 1217.5,787 1238.5,787 ; 1217.5,788 1239.5,788 ; 1218.5,537 1250.5,537 ; 1218.5,789 1240.5,789 ; 1219.5,538 1251.5,538 ; 1219.5,704 1273.5,704 ; 1219.5,790 1240.5,790 ; 1220.5,539 1252.5,539 ; 1220.5,540 1253.5,540 ; 1220.5,791 1241.5,791 ; 1221.5,792 1242.5,792 ; 1222.5,646 1287.5,646 ; 1222.5,793 1243.5,793 ; 1223.5,705 1272.5,705 ; 1223.5,794 1244.5,794 ; 1224.5,567 1345.5,567 ; 1224.5,795 1245.5,795 ; 1225.5,796 1246.5,796 ; 1226.5,441 1291.5,441 ; 1226.5,442 1291.5,442 ; 1226.5,443 1291.5,443 ; 1226.5,444 1292.5,444 ; 1226.5,445 1292.5,445 ; 1226.5,446 1292.5,446 ; 1226.5,447 1293.5,447 ; 1226.5,448 1293.5,448 ; 1226.5,449 1293.5,449 ; 1226.5,450 1293.5,450 ; 1226.5,451 1293.5,451 ; 1226.5,452 1293.5,452 ; 1226.5,453 1294.5,453 ; 1226.5,454 1294.5,454 ; 1226.5,455 1294.5,455 ; 1226.5,797 1247.5,797 ; 1226.5,798 1248.5,798 ; 1227.5,437 1289.5,437 ; 1227.5,438 1289.5,438 ; 1227.5,439 1290.5,439 ; 1227.5,440 1290.5,440 ; 1227.5,456 1294.5,456 ; 1227.5,457 1294.5,457 ; 1227.5,458 1294.5,458 ; 1227.5,647 1285.5,647 ; 1227.5,706 1272.5,706 ; 1227.5,799 1248.5,799 ; 1228.5,435 1288.5,435 ; 1228.5,436 1288.5,436 ; 1228.5,459 1294.5,459 ; 1228.5,460 1293.5,460 ; 1228.5,461 1293.5,461 ; 1228.5,772 1292.5,772 ; 1228.5,800 1249.5,800 ; 1229.5,433 1286.5,433 ; 1229.5,434 1287.5,434 ; 1229.5,462 1293.5,462 ; 1229.5,463 1293.5,463 ; 1229.5,464 1293.5,464 ; 1229.5,801 1250.5,801 ; 1230.5,431 1285.5,431 ; 1230.5,432 1285.5,432 ; 1230.5,465 1293.5,465 ; 1230.5,466 1293.5,466 ; 1230.5,802 1251.5,802 ; 1231.5,429 1283.5,429 ; 1231.5,430 1284.5,430 ; 1231.5,467 1294.5,467 ; 1231.5,568 1346.5,568 ; 1231.5,707 1272.5,707 ; 1231.5,773 1296.5,773 ; 1231.5,803 1252.5,803 ; 1232.5,428 1282.5,428 ; 1232.5,468 1295.5,468 ; 1232.5,469 1296.5,469 ; 1232.5,648 1284.5,648 ; 1232.5,804 1253.5,804 ; 1233.5,427 1281.5,427 ; 1233.5,470 1297.5,470 ; 1233.5,805 1254.5,805 ; 1234.5,426 1280.5,426 ; 1234.5,471 1298.5,471 ; 1234.5,472 1299.5,472 ; 1234.5,774 1299.5,774 ; 1234.5,806 1255.5,806 ; 1234.5,807 1256.5,807 ; 1235.5,425 1279.5,425 ; 1235.5,473 1300.5,473 ; 1235.5,708 1271.5,708 ; 1235.5,808 1256.5,808 ; 1236.5,424 1277.5,424 ; 1236.5,474 1301.5,474 ; 1236.5,809 1257.5,809 ; 1237.5,423 1276.5,423 ; 1237.5,475 1302.5,475 ; 1237.5,649 1282.5,649 ; 1237.5,775 1302.5,775 ; 1237.5,810 1258.5,810 ; 1238.5,422 1274.5,422 ; 1238.5,476 1303.5,476 ; 1238.5,709 1271.5,709 ; 1238.5,811 1259.5,811 ; 1239.5,477 1304.5,477 ; 1239.5,569 1347.5,569 ; 1239.5,812 1260.5,812 ; 1240.5,421 1272.5,421 ; 1240.5,478 1305.5,478 ; 1240.5,650 1281.5,650 ; 1240.5,813 1261.5,813 ; 1240.5,814 1262.5,814 ; 1241.5,651 1279.5,651 ; 1241.5,776 1306.5,776 ; 1241.5,815 1263.5,815 ; 1242.5,420 1271.5,420 ; 1242.5,479 1306.5,479 ; 1242.5,652 1278.5,652 ; 1242.5,710 1270.5,710 ; 1242.5,816 1264.5,816 ; 1243.5,480 1307.5,480 ; 1243.5,653 1276.5,653 ; 1243.5,654 1275.5,654 ; 1243.5,655 1273.5,655 ; 1243.5,656 1272.5,656 ; 1243.5,657 1270.5,657 ; 1243.5,817 1265.5,817 ; 1244.5,419 1268.5,419 ; 1244.5,481 1308.5,481 ; 1244.5,658 1269.5,658 ; 1244.5,659 1269.5,659 ; 1244.5,660 1269.5,660 ; 1244.5,661 1269.5,661 ; 1244.5,662 1269.5,662 ; 1244.5,663 1269.5,663 ; 1244.5,664 1269.5,664 ; 1244.5,665 1269.5,665 ; 1244.5,777 1309.5,777 ; 1244.5,818 1266.5,818 ; 1245.5,666 1269.5,666 ; 1245.5,667 1270.5,667 ; 1245.5,668 1270.5,668 ; 1245.5,669 1270.5,669 ; 1245.5,670 1270.5,670 ; 1245.5,671 1270.5,671 ; 1245.5,672 1270.5,672 ; 1245.5,673 1270.5,673 ; 1245.5,674 1270.5,674 ; 1245.5,819 1266.5,819 ; 1246.5,482 1309.5,482 ; 1246.5,570 1348.5,570 ; 1246.5,675 1270.5,675 ; 1246.5,676 1270.5,676 ; 1246.5,677 1270.5,677 ; 1246.5,678 1271.5,678 ; 1246.5,679 1271.5,679 ; 1246.5,680 1271.5,680 ; 1246.5,681 1271.5,681 ; 1246.5,682 1271.5,682 ; 1246.5,683 1271.5,683 ; 1246.5,689 1272.5,689 ; 1246.5,711 1269.5,711 ; 1246.5,820 1267.5,820 ; 1247.5,418 1265.5,418 ; 1247.5,684 1271.5,684 ; 1247.5,685 1271.5,685 ; 1247.5,686 1271.5,686 ; 1247.5,687 1271.5,687 ; 1247.5,688 1271.5,688 ; 1247.5,778 1313.5,778 ; 1247.5,821 1268.5,821 ; 1248.5,483 1310.5,483 ; 1248.5,822 1269.5,822 ; 1248.5,823 1270.5,823 ; 1249.5,571 1349.5,571 ; 1249.5,824 1271.5,824 ; 1250.5,484 1311.5,484 ; 1250.5,572 1349.5,572 ; 1250.5,573 1350.5,573 ; 1250.5,712 1268.5,712 ; 1250.5,779 1316.5,779 ; 1250.5,825 1272.5,825 ; 1251.5,417 1260.5,417 ; 1251.5,574 1351.5,574 ; 1251.5,826 1273.5,826 ; 1252.5,575 1352.5,575 ; 1252.5,827 1274.5,827 ; 1253.5,485 1312.5,485 ; 1253.5,576 1287.5,576 ; 1253.5,828 1274.5,828 ; 1254.5,577 1287.5,577 ; 1254.5,713 1266.5,713 ; 1254.5,780 1320.5,780 ; 1254.5,829 1275.5,829 ; 1255.5,578 1287.5,578 ; 1255.5,830 1276.5,830 ; 1256.5,486 1271.5,486 ; 1256.5,579 1288.5,579 ; 1256.5,831 1277.5,831 ; 1256.5,832 1278.5,832 ; 1257.5,580 1289.5,580 ; 1257.5,781 1323.5,781 ; 1257.5,833 1282.5,833 ; 1258.5,581 1290.5,581 ; 1258.5,631 1302.5,631 ; 1258.5,834 1285.5,834 ; 1259.5,582 1291.5,582 ; 1259.5,583 1292.5,583 ; 1259.5,630 1303.5,630 ; 1259.5,835 1288.5,835 ; 1260.5,584 1293.5,584 ; 1260.5,782 1326.5,782 ; 1260.5,836 1290.5,836 ; 1261.5,585 1294.5,585 ; 1261.5,629 1303.5,629 ; 1261.5,837 1292.5,837 ; 1262.5,586 1294.5,586 ; 1262.5,628 1304.5,628 ; 1262.5,838 1294.5,838 ; 1262.5,839 1296.5,839 ; 1262.5,841 1299.5,841 ; 1262.5,842 1300.5,842 ; 1262.5,843 1302.5,843 ; 1262.5,844 1303.5,844 ; 1262.5,845 1304.5,845 ; 1262.5,846 1305.5,846 ; 1262.5,847 1306.5,847 ; 1262.5,848 1307.5,848 ; 1263.5,587 1295.5,587 ; 1263.5,627 1304.5,627 ; 1263.5,783 1366.5,783 ; 1263.5,840 1298.5,840 ; 1263.5,849 1308.5,849 ; 1263.5,850 1309.5,850 ; 1263.5,851 1310.5,851 ; 1264.5,588 1296.5,588 ; 1264.5,852 1310.5,852 ; 1264.5,853 1311.5,853 ; 1264.5,854 1312.5,854 ; 1265.5,589 1297.5,589 ; 1265.5,626 1304.5,626 ; 1265.5,855 1312.5,855 ; 1265.5,856 1313.5,856 ; 1266.5,590 1297.5,590 ; 1266.5,625 1305.5,625 ; 1266.5,784 1366.5,784 ; 1266.5,857 1314.5,857 ; 1267.5,591 1298.5,591 ; 1267.5,592 1299.5,592 ; 1267.5,858 1314.5,858 ; 1267.5,859 1314.5,859 ; 1268.5,593 1299.5,593 ; 1268.5,624 1305.5,624 ; 1268.5,860 1315.5,860 ; 1269.5,594 1300.5,594 ; 1269.5,623 1305.5,623 ; 1269.5,785 1366.5,785 ; 1269.5,861 1315.5,861 ; 1269.5,862 1316.5,862 ; 1270.5,595 1300.5,595 ; 1270.5,622 1305.5,622 ; 1270.5,863 1316.5,863 ; 1271.5,596 1301.5,596 ; 1271.5,864 1316.5,864 ; 1272.5,597 1301.5,597 ; 1272.5,621 1305.5,621 ; 1272.5,786 1366.5,786 ; 1272.5,865 1316.5,865 ; 1273.5,486 1313.5,486 ; 1273.5,598 1302.5,598 ; 1273.5,620 1305.5,620 ; 1273.5,866 1316.5,866 ; 1274.5,487 1314.5,487 ; 1274.5,599 1302.5,599 ; 1274.5,600 1302.5,600 ; 1274.5,619 1305.5,619 ; 1274.5,867 1317.5,867 ; 1275.5,488 1315.5,488 ; 1275.5,601 1303.5,601 ; 1275.5,602 1303.5,602 ; 1275.5,618 1306.5,618 ; 1275.5,787 1366.5,787 ; 1275.5,868 1317.5,868 ; 1276.5,489 1316.5,489 ; 1276.5,603 1304.5,603 ; 1276.5,604 1304.5,604 ; 1276.5,616 1306.5,616 ; 1276.5,617 1306.5,617 ; 1276.5,869 1316.5,869 ; 1277.5,490 1317.5,490 ; 1277.5,605 1304.5,605 ; 1277.5,606 1304.5,606 ; 1277.5,607 1305.5,607 ; 1277.5,608 1305.5,608 ; 1277.5,612 1305.5,612 ; 1277.5,613 1305.5,613 ; 1277.5,614 1306.5,614 ; 1277.5,615 1306.5,615 ; 1278.5,491 1318.5,491 ; 1278.5,609 1305.5,609 ; 1278.5,610 1305.5,610 ; 1278.5,611 1305.5,611 ; 1278.5,870 1316.5,870 ; 1279.5,492 1319.5,492 ; 1279.5,788 1366.5,788 ; 1279.5,871 1316.5,871 ; 1280.5,493 1320.5,493 ; 1280.5,872 1316.5,872 ; 1281.5,494 1321.5,494 ; 1282.5,495 1322.5,495 ; 1282.5,789 1366.5,789 ; 1282.5,873 1316.5,873 ; 1283.5,496 1323.5,496 ; 1283.5,874 1315.5,874 ; 1284.5,497 1324.5,497 ; 1285.5,498 1325.5,498 ; 1285.5,790 1366.5,790 ; 1285.5,875 1314.5,875 ; 1286.5,499 1326.5,499 ; 1287.5,500 1327.5,500 ; 1287.5,876 1313.5,876 ; 1288.5,501 1328.5,501 ; 1288.5,791 1366.5,791 ; 1289.5,502 1329.5,502 ; 1290.5,503 1330.5,503 ; 1290.5,877 1312.5,877 ; 1291.5,504 1331.5,504 ; 1292.5,505 1332.5,505 ; 1292.5,576 1352.5,576 ; 1292.5,792 1365.5,792 ; 1292.5,878 1311.5,878 ; 1293.5,506 1333.5,506 ; 1294.5,507 1334.5,507 ; 1295.5,508 1335.5,508 ; 1295.5,793 1365.5,793 ; 1296.5,509 1336.5,509 ; 1296.5,879 1308.5,879 ; 1297.5,510 1337.5,510 ; 1298.5,511 1338.5,511 ; 1298.5,577 1353.5,577 ; 1298.5,794 1365.5,794 ; 1299.5,512 1339.5,512 ; 1299.5,880 1306.5,880 ; 1300.5,513 1340.5,513 ; 1301.5,514 1341.5,514 ; 1302.5,515 1342.5,515 ; 1302.5,795 1364.5,795 ; 1303.5,516 1343.5,516 ; 1304.5,517 1344.5,517 ; 1305.5,518 1345.5,518 ; 1305.5,578 1353.5,578 ; 1305.5,796 1363.5,796 ; 1306.5,519 1346.5,519 ; 1307.5,520 1347.5,520 ; 1308.5,521 1348.5,521 ; 1308.5,797 1363.5,797 ; 1309.5,522 1349.5,522 ; 1310.5,523 1350.5,523 ; 1311.5,524 1351.5,524 ; 1311.5,798 1362.5,798 ; 1312.5,525 1352.5,525 ; 1312.5,579 1354.5,579 ; 1313.5,526 1353.5,526 ; 1314.5,527 1354.5,527 ; 1314.5,799 1361.5,799 ; 1315.5,528 1355.5,528 ; 1316.5,529 1356.5,529 ; 1317.5,530 1357.5,530 ; 1318.5,531 1358.5,531 ; 1318.5,580 1355.5,580 ; 1318.5,800 1360.5,800 ; 1319.5,532 1359.5,532 ; 1320.5,533 1360.5,533 ; 1320.5,581 1355.5,581 ; 1321.5,534 1361.5,534 ; 1321.5,582 1356.5,582 ; 1321.5,801 1359.5,801 ; 1322.5,535 1362.5,535 ; 1323.5,536 1363.5,536 ; 1323.5,583 1356.5,583 ; 1324.5,537 1364.5,537 ; 1324.5,584 1357.5,584 ; 1324.5,802 1357.5,802 ; 1325.5,538 1365.5,538 ; 1325.5,539 1366.5,539 ; 1325.5,585 1357.5,585 ; 1325.5,586 1357.5,586 ; 1326.5,540 1367.5,540 ; 1326.5,587 1357.5,587 ; 1327.5,541 1368.5,541 ; 1327.5,588 1358.5,588 ; 1327.5,589 1358.5,589 ; 1327.5,803 1355.5,803 ; 1328.5,542 1369.5,542 ; 1328.5,590 1358.5,590 ; 1328.5,591 1359.5,591 ; 1328.5,592 1359.5,592 ; 1328.5,593 1359.5,593 ; 1328.5,594 1359.5,594 ; 1328.5,595 1359.5,595 ; 1328.5,596 1359.5,596 ; 1328.5,597 1359.5,597 ; 1328.5,598 1359.5,598 ; 1328.5,599 1359.5,599 ; 1328.5,600 1359.5,600 ; 1329.5,543 1370.5,543 ; 1329.5,601 1360.5,601 ; 1329.5,602 1360.5,602 ; 1329.5,603 1360.5,603 ; 1329.5,604 1360.5,604 ; 1329.5,605 1360.5,605 ; 1329.5,606 1360.5,606 ; 1329.5,607 1360.5,607 ; 1329.5,608 1360.5,608 ; 1329.5,609 1360.5,609 ; 1329.5,610 1360.5,610 ; 1329.5,611 1360.5,611 ; 1329.5,612 1360.5,612 ; 1329.5,613 1360.5,613 ; 1329.5,614 1360.5,614 ; 1329.5,615 1360.5,615 ; 1329.5,616 1360.5,616 ; 1329.5,617 1360.5,617 ; 1329.5,618 1360.5,618 ; 1330.5,544 1371.5,544 ; 1330.5,619 1360.5,619 ; 1330.5,620 1360.5,620 ; 1330.5,621 1360.5,621 ; 1330.5,622 1360.5,622 ; 1330.5,623 1360.5,623 ; 1330.5,624 1360.5,624 ; 1330.5,625 1360.5,625 ; 1330.5,626 1360.5,626 ; 1330.5,627 1360.5,627 ; 1330.5,628 1360.5,628 ; 1330.5,629 1360.5,629 ; 1330.5,630 1361.5,630 ; 1330.5,631 1361.5,631 ; 1330.5,632 1361.5,632 ; 1330.5,633 1361.5,633 ; 1330.5,634 1361.5,634 ; 1330.5,635 1361.5,635 ; 1330.5,636 1361.5,636 ; 1330.5,637 1361.5,637 ; 1331.5,545 1372.5,545 ; 1331.5,638 1361.5,638 ; 1331.5,639 1361.5,639 ; 1331.5,640 1361.5,640 ; 1331.5,641 1361.5,641 ; 1331.5,642 1361.5,642 ; 1331.5,643 1361.5,643 ; 1331.5,644 1361.5,644 ; 1331.5,645 1361.5,645 ; 1331.5,646 1361.5,646 ; 1331.5,647 1361.5,647 ; 1331.5,648 1361.5,648 ; 1331.5,649 1420.5,649 ; 1331.5,650 1419.5,650 ; 1331.5,651 1418.5,651 ; 1331.5,652 1417.5,652 ; 1331.5,653 1416.5,653 ; 1331.5,654 1414.5,654 ; 1331.5,655 1413.5,655 ; 1331.5,804 1353.5,804 ; 1332.5,546 1373.5,546 ; 1332.5,656 1411.5,656 ; 1332.5,657 1409.5,657 ; 1332.5,658 1408.5,658 ; 1332.5,659 1406.5,659 ; 1332.5,660 1405.5,660 ; 1332.5,661 1403.5,661 ; 1332.5,662 1402.5,662 ; 1332.5,663 1400.5,663 ; 1332.5,664 1398.5,664 ; 1332.5,665 1397.5,665 ; 1332.5,666 1395.5,666 ; 1332.5,667 1393.5,667 ; 1332.5,668 1392.5,668 ; 1332.5,669 1390.5,669 ; 1332.5,670 1389.5,670 ; 1332.5,671 1387.5,671 ; 1332.5,672 1385.5,672 ; 1332.5,673 1384.5,673 ; 1332.5,674 1382.5,674 ; 1333.5,547 1374.5,547 ; 1333.5,675 1380.5,675 ; 1333.5,676 1379.5,676 ; 1333.5,677 1377.5,677 ; 1333.5,678 1376.5,678 ; 1333.5,679 1374.5,679 ; 1333.5,680 1372.5,680 ; 1333.5,681 1371.5,681 ; 1333.5,682 1369.5,682 ; 1333.5,683 1368.5,683 ; 1333.5,684 1366.5,684 ; 1333.5,685 1364.5,685 ; 1333.5,686 1363.5,686 ; 1333.5,687 1363.5,687 ; 1333.5,688 1363.5,688 ; 1333.5,689 1363.5,689 ; 1333.5,690 1363.5,690 ; 1334.5,548 1375.5,548 ; 1334.5,691 1363.5,691 ; 1334.5,692 1363.5,692 ; 1334.5,693 1363.5,693 ; 1334.5,694 1363.5,694 ; 1334.5,695 1363.5,695 ; 1334.5,696 1363.5,696 ; 1334.5,697 1363.5,697 ; 1334.5,698 1363.5,698 ; 1334.5,699 1363.5,699 ; 1334.5,700 1363.5,700 ; 1334.5,701 1363.5,701 ; 1334.5,702 1363.5,702 ; 1334.5,703 1363.5,703 ; 1334.5,704 1363.5,704 ; 1334.5,705 1363.5,705 ; 1334.5,706 1363.5,706 ; 1334.5,707 1363.5,707 ; 1334.5,708 1363.5,708 ; 1334.5,782 1366.5,782 ; 1335.5,549 1376.5,549 ; 1335.5,709 1364.5,709 ; 1335.5,710 1364.5,710 ; 1335.5,711 1364.5,711 ; 1335.5,712 1364.5,712 ; 1335.5,713 1364.5,713 ; 1335.5,714 1364.5,714 ; 1335.5,715 1364.5,715 ; 1335.5,716 1364.5,716 ; 1335.5,717 1364.5,717 ; 1335.5,718 1364.5,718 ; 1335.5,719 1364.5,719 ; 1335.5,720 1364.5,720 ; 1335.5,721 1364.5,721 ; 1335.5,722 1364.5,722 ; 1335.5,723 1364.5,723 ; 1335.5,724 1364.5,724 ; 1335.5,805 1349.5,805 ; 1336.5,550 1377.5,550 ; 1336.5,725 1364.5,725 ; 1336.5,726 1364.5,726 ; 1336.5,727 1364.5,727 ; 1336.5,728 1364.5,728 ; 1336.5,729 1364.5,729 ; 1336.5,730 1364.5,730 ; 1336.5,731 1364.5,731 ; 1336.5,732 1364.5,732 ; 1336.5,733 1364.5,733 ; 1336.5,734 1364.5,734 ; 1336.5,735 1364.5,735 ; 1336.5,736 1364.5,736 ; 1336.5,737 1365.5,737 ; 1336.5,738 1365.5,738 ; 1336.5,739 1365.5,739 ; 1336.5,740 1365.5,740 ; 1336.5,741 1365.5,741 ; 1336.5,742 1365.5,742 ; 1336.5,781 1366.5,781 ; 1337.5,551 1378.5,551 ; 1337.5,743 1365.5,743 ; 1337.5,744 1365.5,744 ; 1337.5,745 1365.5,745 ; 1337.5,746 1365.5,746 ; 1337.5,747 1365.5,747 ; 1337.5,748 1365.5,748 ; 1337.5,749 1365.5,749 ; 1337.5,750 1365.5,750 ; 1337.5,751 1365.5,751 ; 1337.5,752 1365.5,752 ; 1337.5,753 1365.5,753 ; 1337.5,754 1365.5,754 ; 1337.5,755 1365.5,755 ; 1337.5,756 1365.5,756 ; 1337.5,757 1365.5,757 ; 1337.5,758 1365.5,758 ; 1337.5,759 1365.5,759 ; 1337.5,760 1366.5,760 ; 1337.5,780 1366.5,780 ; 1338.5,552 1379.5,552 ; 1338.5,761 1366.5,761 ; 1338.5,762 1366.5,762 ; 1338.5,763 1366.5,763 ; 1338.5,764 1366.5,764 ; 1338.5,765 1366.5,765 ; 1338.5,766 1366.5,766 ; 1338.5,767 1366.5,767 ; 1338.5,768 1366.5,768 ; 1338.5,769 1366.5,769 ; 1338.5,770 1366.5,770 ; 1338.5,771 1366.5,771 ; 1338.5,772 1366.5,772 ; 1338.5,773 1366.5,773 ; 1338.5,774 1366.5,774 ; 1338.5,775 1366.5,775 ; 1338.5,776 1366.5,776 ; 1338.5,777 1366.5,777 ; 1338.5,778 1366.5,778 ; 1338.5,779 1366.5,779 ; 1339.5,553 1380.5,553 ; 1340.5,554 1381.5,554 ; 1341.5,555 1382.5,555 ; 1342.5,556 1383.5,556 ; 1343.5,557 1384.5,557 ; 1344.5,558 1385.5,558 ; 1345.5,559 1386.5,559 ; 1346.5,560 1387.5,560 ; 1347.5,561 1388.5,561 ; 1348.5,562 1389.5,562 ; 1349.5,563 1390.5,563 ; 1350.5,564 1391.5,564 ; 1351.5,565 1392.5,565 ; 1352.5,566 1393.5,566 ; 1353.5,567 1394.5,567 ; 1354.5,568 1395.5,568 ; 1355.5,569 1396.5,569 ; 1356.5,570 1397.5,570 ; 1357.5,571 1398.5,571 ; 1358.5,572 1399.5,572 ; 1359.5,573 1400.5,573 ; 1360.5,574 1401.5,574 ; 1361.5,575 1402.5,575 ; 1362.5,576 1403.5,576 ; 1363.5,577 1404.5,577 ; 1364.5,578 1405.5,578 ; 1364.5,648 1422.5,648 ; 1365.5,579 1406.5,579 ; 1366.5,580 1407.5,580 ; 1366.5,647 1422.5,647 ; 1367.5,581 1408.5,581 ; 1367.5,646 1423.5,646 ; 1368.5,582 1409.5,582 ; 1369.5,583 1410.5,583 ; 1369.5,645 1424.5,645 ; 1370.5,584 1411.5,584 ; 1370.5,644 1425.5,644 ; 1371.5,585 1412.5,585 ; 1371.5,643 1425.5,643 ; 1372.5,586 1413.5,586 ; 1373.5,587 1414.5,587 ; 1373.5,642 1426.5,642 ; 1374.5,588 1415.5,588 ; 1374.5,641 1427.5,641 ; 1375.5,589 1416.5,589 ; 1376.5,590 1416.5,590 ; 1376.5,640 1427.5,640 ; 1377.5,591 1417.5,591 ; 1378.5,592 1418.5,592 ; 1378.5,639 1428.5,639 ; 1379.5,593 1419.5,593 ; 1379.5,638 1428.5,638 ; 1380.5,594 1420.5,594 ; 1381.5,595 1421.5,595 ; 1381.5,637 1429.5,637 ; 1382.5,596 1421.5,596 ; 1382.5,597 1422.5,597 ; 1382.5,636 1429.5,636 ; 1384.5,598 1423.5,598 ; 1384.5,599 1423.5,599 ; 1384.5,635 1429.5,635 ; 1385.5,600 1424.5,600 ; 1385.5,634 1430.5,634 ; 1386.5,601 1425.5,601 ; 1387.5,602 1425.5,602 ; 1387.5,633 1430.5,633 ; 1388.5,603 1426.5,603 ; 1388.5,632 1430.5,632 ; 1389.5,604 1426.5,604 ; 1390.5,605 1427.5,605 ; 1390.5,631 1430.5,631 ; 1391.5,606 1427.5,606 ; 1391.5,630 1431.5,630 ; 1392.5,607 1428.5,607 ; 1392.5,629 1431.5,629 ; 1393.5,608 1428.5,608 ; 1393.5,609 1428.5,609 ; 1393.5,628 1431.5,628 ; 1394.5,610 1429.5,610 ; 1394.5,611 1429.5,611 ; 1394.5,627 1431.5,627 ; 1395.5,612 1429.5,612 ; 1395.5,613 1430.5,613 ; 1395.5,625 1431.5,625 ; 1395.5,626 1431.5,626 ; 1396.5,614 1430.5,614 ; 1396.5,615 1430.5,615 ; 1396.5,616 1430.5,616 ; 1396.5,617 1431.5,617 ; 1396.5,621 1431.5,621 ; 1396.5,622 1431.5,622 ; 1396.5,623 1431.5,623 ; 1396.5,624 1431.5,624 ; 1397.5,618 1431.5,618 ; 1397.5,619 1431.5,619 ; 1397.5,620 1431.5,620

## Polygon pours and split planes (outlines as drawn)
GND on Top Layer "Top-No Net 1" (solid, pour order 13): 694.08,570 683.11,581.48 594,581.48 471.74,581.48 423.9,631.55 418.58,637.11 418.58,715 695,715
GND on Top Layer "Top-No Net 1" (solid, pour order 16): 739.76,445.24 739.76,280.24 809.76,210.24 954.76,210.24 1019.76,275.24 1119.76,375.24 1119.76,445.24 1064.76,445.24 979.76,360.24 909.76,360.24 909.76,322.74 782.26,322.74 779.76,325.24 759.76,345.24 759.76,445.24
GND on Top Layer "Top-No Net 1" (solid, pour order 17): 304.76,355.24 659.76,355.24 794.76,210.93 979.76,210.93 1109.76,349.89 1114.76,355.24 1519.76,355.24 1519.76,45.24 304.76,45.24
NetC5_2 on Top Layer "Top-No Net 1" (solid, pour order 15): 825,590 825,560 850,560 920,510 1010,510 1010,640 895,640 850,590
VOUT on Top Layer "Top Layer-No Net" (solid, pour order 14): 1250,640 1390,640 1390,590 1520,460 1520,370 1270,370 1260,380 1260,500 1250,510
GND on Bottom Layer "Top-No Net 1" (solid, pour order 18): 309.76,211.33 309.76,915.24 1399.76,915.24 1494.76,915.24 1519.76,875.69 1519.76,45.24 314.76,45.24 309.76,53.15

## Other copper
Top Layer:
  rectangle net VOUT: 1445,370 1585,465
  rectangle net GND: 1430,25 1575,125
  region net GND: 735.98,629.21 734.76,780.24 794.76,780.24 794.76,700.24 763.54,669.02 763.54,629.21
  region net VOUT: 1499.76,365.24 1414.76,365.24 1414.76,445.24 1419.76,450.24 1499.76,450.24
  region net VIN: 324.76,595.24 449.76,595.24 464.76,580.24 624.76,580.24 640,570 690,570 690,520 643.27,490.24 344.76,490.24 324.76,510.24
  region net GND: 565,910 1495,910 1515,875 1500,675 1375,675 1025,675 1000,700 978.07,707.95 942.05,707.95 939.76,710.24 736.39,710.24 714.02,732.61 714.02,782.95 666.46,782.95 666.46,727.52 677.04,727.52 679.42,723.95 688.52,714.86 686.6,710.24 681.19,710.24 679.74,711.69 673.29,705.24 419.76,705.24 419.76,770.24 424.76,775.24 389.76,810.24 324.76,810.24 304.76,830.24 304.76,910.24 404.76,910.24
Bottom Layer:
  rectangle net GND: 309.76,50.24 404.76,145.24
  rectangle net GND: 1424.76,56.03 1519.76,135.24
  rectangle net GND: 1430,25 1575,125
  rectangle net VOUT: 1425,365 1560,465
  text "Party Mode Point of Load" at 1250,115 h70
  text "Power Chode Node V1.0" at 1240,55 h70

## Silkscreen, mask and mechanical layers (free items; w line width, h text height)
Top Overlay:
  rectangle: 979.76,127.74 997.26,165.24
  rectangle: 997.26,135.24 1004.76,162.74
  rectangle: 979.76,120.24 989.76,170.24
  lines w10: 714.76,145.24 1014.76,145.24 ; 1014.76,145.24 979.76,180.24 979.76,110.24 1014.76,145.24
  text "GND" at 420,850 h50
  text "R8 = 10k * (Vout - 0.8V) / 0.8V" at 885,840 h50
  text "PWRGOOD" at 420,745 h50
  text "ENABLE" at 420,670 h50
  text "Vout" at 1620,590 h30 r270
  text "VOUT" at 1410,470 h50
  text "7.5-17V IN" at 320,465 h50
  text "Vin" at 270,390 h30 r90
  text "Data Flow" at 754.76,90.24 h50
  text "GND" at 420,80 h50
  text "GND" at 1310,75 h50
Bottom Overlay:
  text "Michael Kapuscik" at 785,870 h50
  text "SBHX" at 1071.69,270.53 h150
Bottom Solder:
  drawing of 1370 lines, arcs and shapes, not listed
  text "Party Mode Point of Load" at 1250,115 h70
  text "Power Chode Node V1.0" at 1240,55 h70
Mechanical 1:
  lines w10: 125,0 295,0 1405,0 1705,0 1705,480 1705,955 125,955 125,295 125,0